# EAGLE board lora_module (EAGLE 9.5.1)
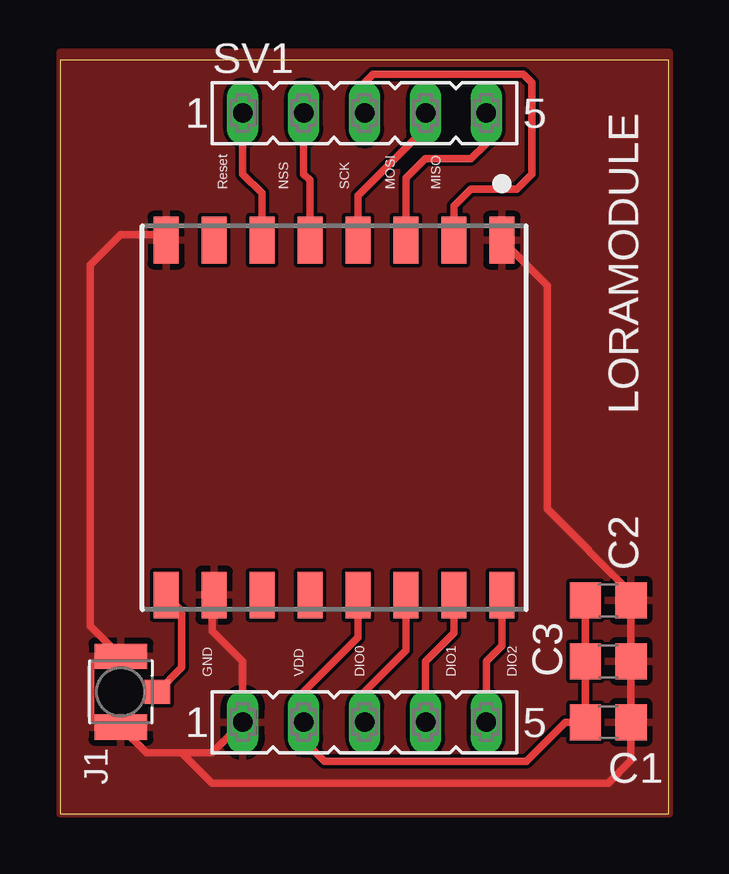
[diagram p0: board, top side]

Size 25.38 x 31.42 mm. Coordinates in mm from the lower left corner, seen from the top.
Outline: 0,0 25.38,0 25.38,31.42 0,31.42 0,0
Copper layers (1*16): Top 0.035mm / dielectric 1.5mm / Bottom 0.035mm
Design rules "default *": minimum track width 6mil, minimum drill 0.35mm, track to track 6mil, track to pad 6mil, pad to pad 6mil, via to via 6mil, smd to smd 6mil, copper to edge 0mil, drill to drill 6mil, minimum pad ring 10mil, minimum via ring 8mil, stop-mask expansion 4mil, vias tented up to drill 0mil, thermal gap 10mil

## Footprints (pad centres in the part's own frame; a part is rotated, then mirrored left to right if it is on the bottom)
C0805 = smd 1.3 x 1.5: 1 -0.95,0; 2 0.95,0
HRS_U.FL-R-SMT-1(10) = smd 1.05 x 2.2: 1 -1.475,0; 3 1.475,0 | smd 1 x 1.05: 2 0,-1.525
XCVR_RFM95W-868S2 = smd 1.95 x 1.05: 1 -7.4,7; 2 -7.4,5; 3 -7.4,3; 4 -7.4,1; 5 -7.4,-1; 6 -7.4,-3; 7 -7.4,-5; 8 -7.4,-7; 9 7.4,-7; 10 7.4,-5; 11 7.4,-3; 12 7.4,-1; 13 7.4,1; 14 7.4,3; 15 7.4,5; 16 7.4,7
FE05-1 = drill 0.813 long: 1 -5.08,0; 2 -2.54,0; 3 0,0; 4 2.54,0; 5 5.08,0

## Placement (x,y rotation side)
C1  1uF  [C0805]  22.86,3.81 0 top
C2  10uF  [C0805]  22.86,8.89 0 top
C3  100nF  [C0805]  22.86,6.35 0 top
J1  U.FL-R-SMT-1(10)  [HRS_U.FL-R-SMT-1(10)]  2.54,5.08 90 top
LORAMODULE  RFM95W-868S2  [XCVR_RFM95W-868S2]  11.43,16.51 270 top
SV1  [FE05-1]  12.7,29.21 0 top
SV2  [FE05-1]  12.7,3.81 0 top

## Library data of the parts
C1-C3 = rcl; SPICEPREFIX: C
J1 = U.FL-R-SMT-1_10_; AVAILABILITY: Unavailable; DESCRIPTION: U.FL Series 6 Ghz 50 Ohm Ultra-small SMT Coaxial Cable Receptacle; MF: Hirose; MP: U.FL-R-SMT-1_10_; PACKAGE: None; PRICE: None
LORAMODULE = RFM95W-868S2; AVAILABILITY: Unavailable; DESCRIPTION: RF TXRX MODULE ISM<1GHZ; MF: RF; MP: RFM95W-868S2; PACKAGE: SMD-16 Hope Microelectronics; PRICE: None
SV1 SV2 = con-lsta; OC_FARNELL: unknown; OC_NEWARK: unknown

## Nets
DIO0: LORAMODULE.14 SV2.3
DIO1: LORAMODULE.15 SV2.4
DIO2: LORAMODULE.16 SV2.5
GND: C1.2 C2.2 C3.2 J1.1 J1.3 LORAMODULE.1 LORAMODULE.8 LORAMODULE.10 SV2.1
MISO: LORAMODULE.2 SV1.3
MOSI: LORAMODULE.3 SV1.5
N$1: J1.2 LORAMODULE.9
NSS: LORAMODULE.5 SV1.2
RESET_LORA: LORAMODULE.6 SV1.1
SCK: LORAMODULE.4 SV1.4
VDD: C1.1 C2.1 C3.1 LORAMODULE.13 SV2.2

## Tracks (layer width: path | path; a pad name or v marks a point on that pad's centre or on a via)
DIO0
  Top 0.305: LORAMODULE.14 14.43,6.81 12.7,5.08 SV2.3
DIO1
  Top 0.305: LORAMODULE.15 16.43,7.54 15.24,6.35 SV2.4
DIO2
  Top 0.305: SV2.5 17.78,6.35 18.43,7 LORAMODULE.16
GND
  Top 0.305: LORAMODULE.10 6.35,9.03 6.35,7.62 7.62,6.35 SV2.1 6.35,2.54 5.08,2.54 | LORAMODULE.8 4.21,24.13 2.54,24.13 1.27,22.86 1.27,7.82 J1.3 2.17,6.18 1.38,6.18 1.29,6.09 1.29,4.07 1.38,3.98 2.17,3.98 J1.1 3.6,2.54 5.08,2.54 | LORAMODULE.1 20.32,22.02 20.32,12.7 23.81,9.21 C2.2 C3.2 C1.2 23.81,2.22 22.86,1.27 6.35,1.27 5.08,2.54
  pour Top: 0,31.75 0,0 25.4,0 25.4,31.75
MISO
  Top 0.305: SV1.3 12.7,30.48 13.06,30.84 19.33,30.84 19.68,30.48 19.68,26.67 19.05,26.04 17.14,26.04 16.43,25.32 LORAMODULE.2
MOSI
  Top 0.305: SV1.5 17.78,27.94 17.14,27.3 15.24,27.3 14.43,26.49 LORAMODULE.3
N$1
  Top 0.305: J1.2 5.08,6.09 5.08,8.46 LORAMODULE.9
NSS
  Top 0.305: LORAMODULE.5 10.43,26.4 10.16,26.67 SV1.2
RESET_LORA
  Top 0.305: LORAMODULE.6 8.43,25.86 7.62,26.67 SV1.1
SCK
  Top 0.305: SV1.4 15.24,28.57 12.43,25.77 LORAMODULE.4
VDD
  Top 0.305: LORAMODULE.13 12.43,7.35 10.16,5.08 SV2.2 10.16,3.05 11.03,2.18 19.45,2.18 21.07,3.81 C1.1 C3.1 C2.1

## Text on the board
tNames: Reset | NSS | SCK | MOSI | MISO | GND | VDD | DIO0 | DIO1 | DIO2